# Altium PCB PCB.PcbDoc (part 2 of 2)
Units mil, origin at the board's own origin, x right, y up, seen from the top; angles counter-clockwise.
Board outline 14787 x 8400 mil, 2 copper layers (Top Layer, Bottom Layer); 237 components, 242 nets, 855 pads, 3 vias.
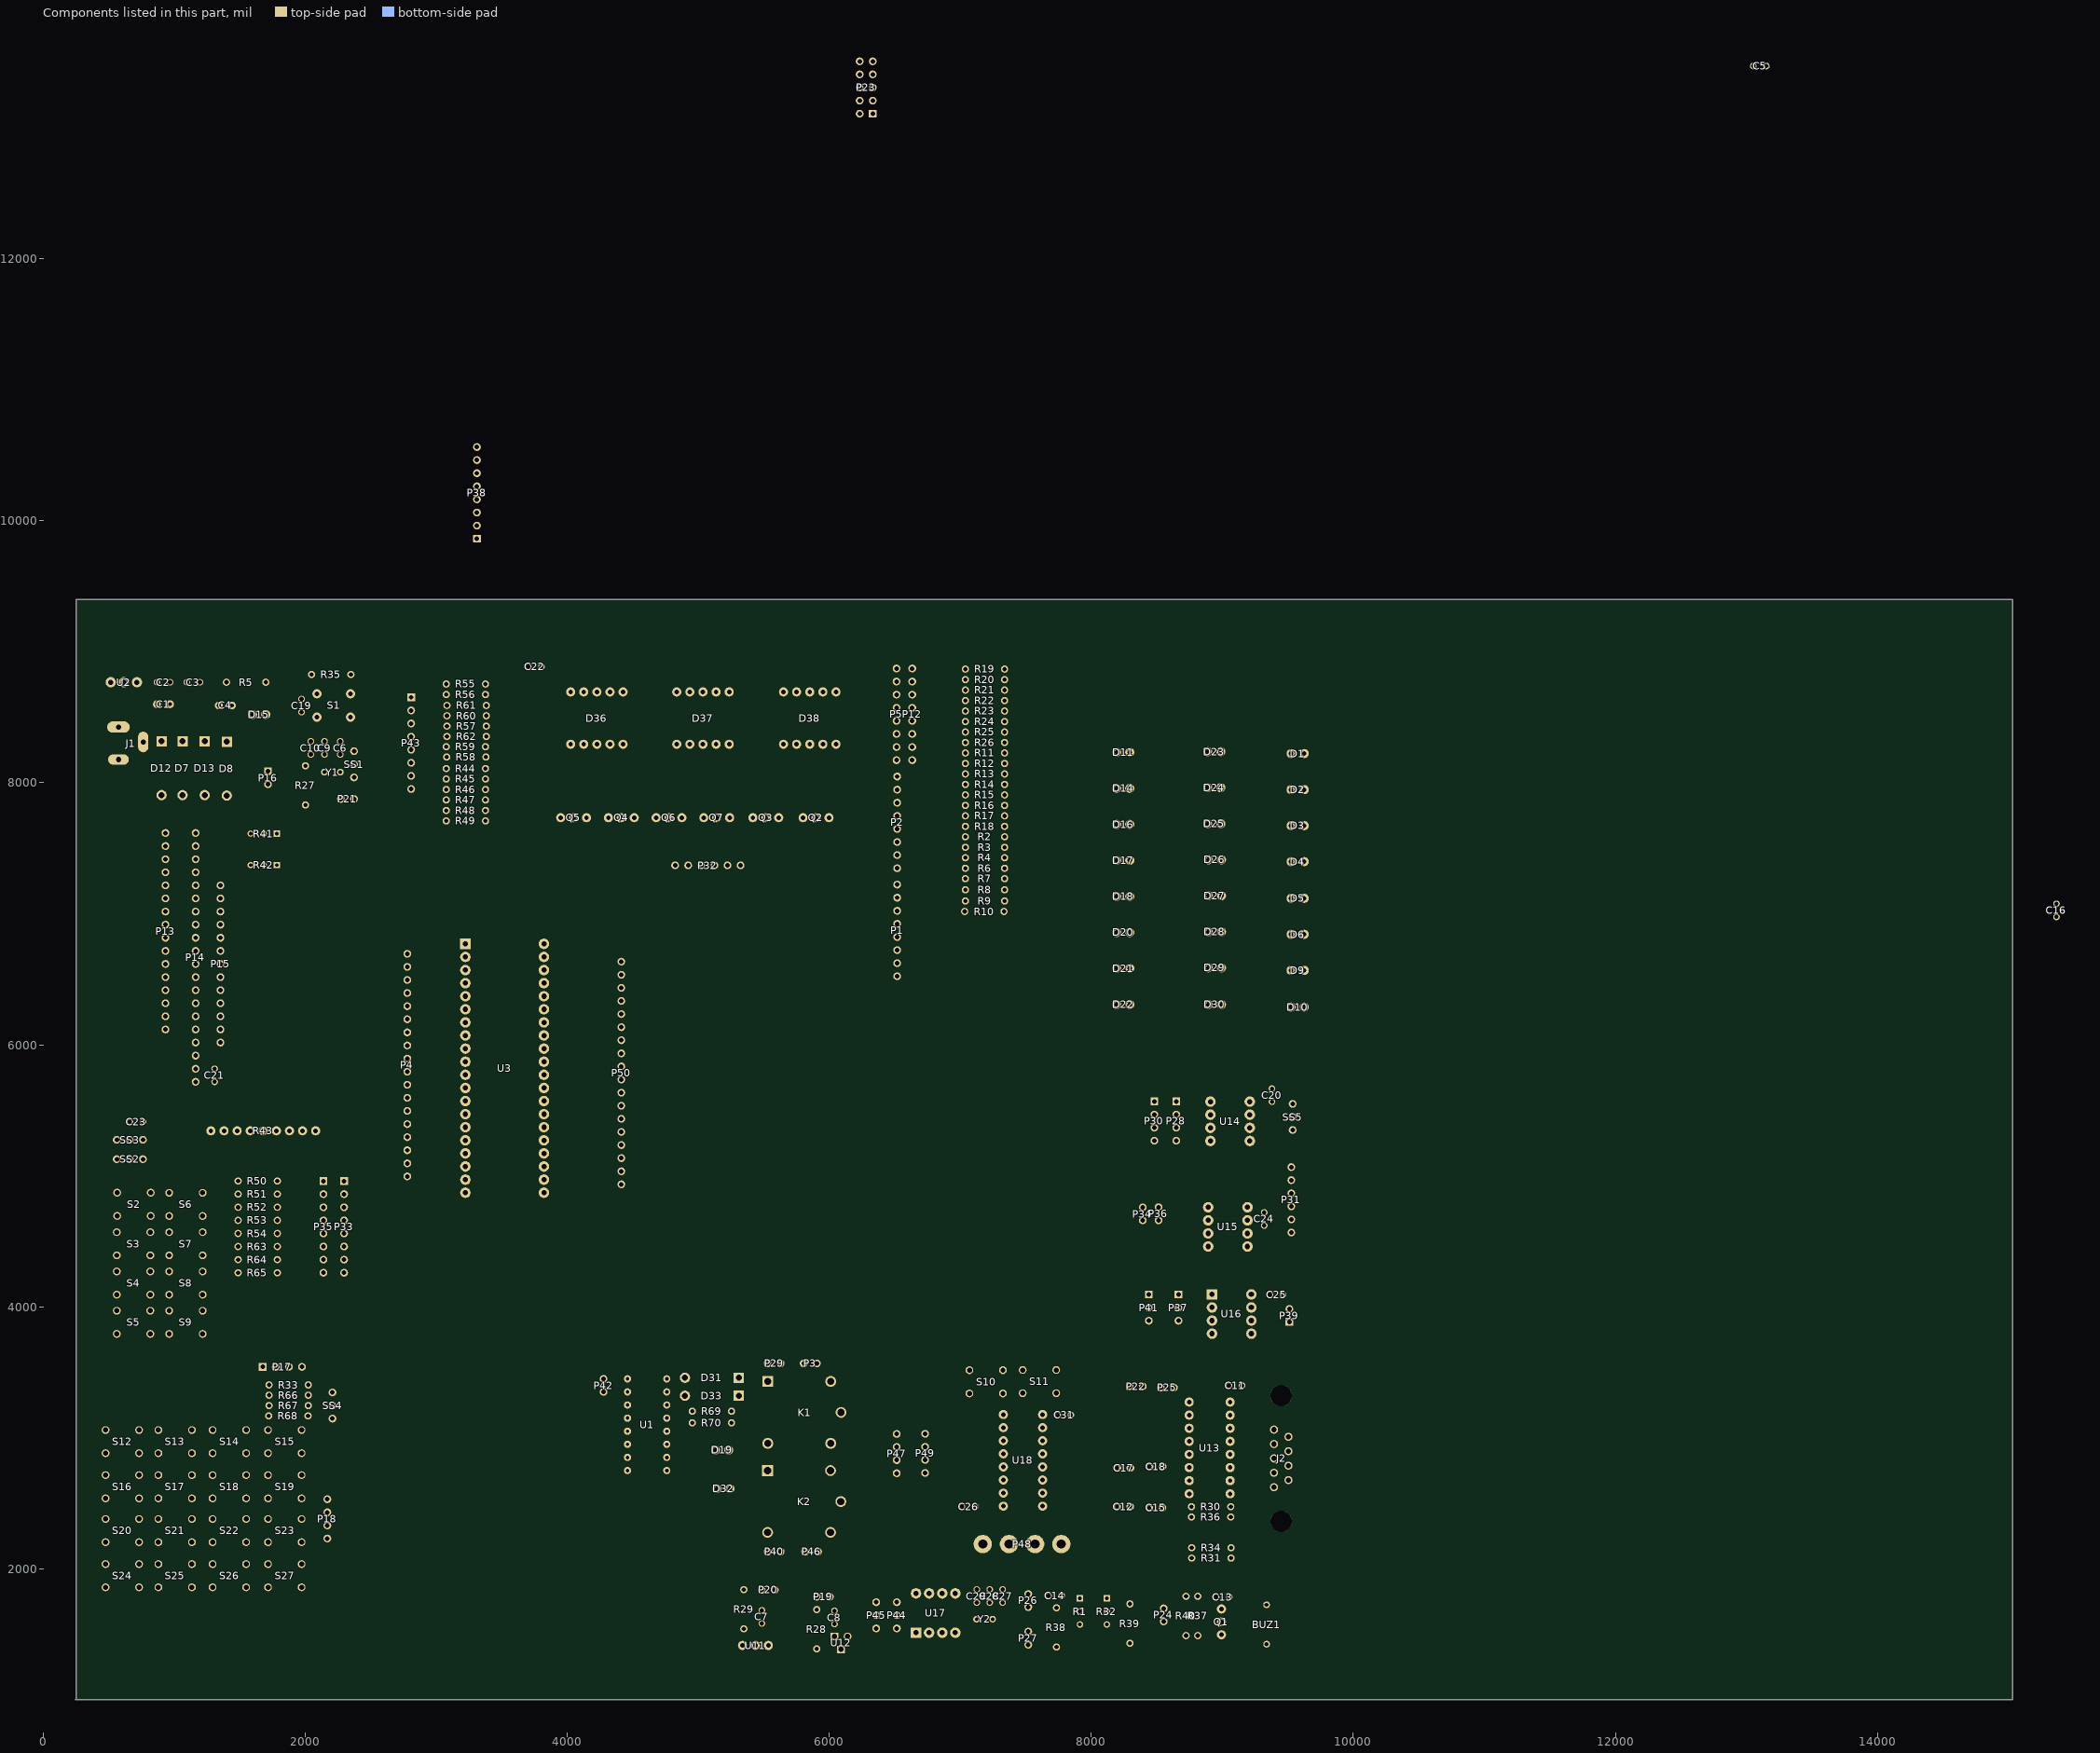
[diagram p2: the components of this part, seen from the top]

## Via types
v1: diameter 50, hole 28, Top Layer to Bottom Layer, 3 vias

## Nets (pads, with @x,y where several pads share a name; then routed paths per layer and width w, separated by ;. In a path a pad name is that pad's centre, name@x,y a point inside that pad or via, vN(x,y) a via of type N, cw(c..) or ccw(c..) an arc to the next point about the centre after c; other vN are vias at no path point) (continued)
copper on no net: (continued)
  Bottom Layer w39.37: 405.92,3551.18 406.24,3551.5 ; 406.24,3512.13 406.24,3639.76 ; 406.24,3561.02 406.24,3551.5 ; 406.24,6170.47 406.24,6166.38 ; 425.92,1267.72 406.24,1287.4 406.24,3551.5 ; 475.13,2035.43 524.35,2035.43 553.87,2064.96 553.87,2340.55 ; 475.13,2379.92 514.5,2379.92 ; 475.13,2714.57 524.35,2714.57 ; 475.13,3059.06 534.19,3059.06 553.87,3039.37 553.87,2744.09 ; 514.5,8767.72 514.5,8629.92 544.03,8600.39 867.26,8600.39 878.68,8600.39 918.05,8639.76 918.05,8679.13 ; 527.66,8177.83 573.68,8177.83 746.52,8177.83 762.66,8193.98 762.66,8311.69 ; 560.76,3969.84 630.57,3969.84 660.57,3999.84 660.57,4222.2 ; 560.76,4269.84 612.93,4269.84 ; 560.76,4569.84 622.77,4569.84 ; 563.72,4871.26 612.93,4871.26 ; 573.68,8425.87 573.68,8429.8 1029.58,8429.8 1055.84,8403.54 1055.84,8330.78 ; 614.5,8767.72 614.5,8915.35 ; 614.5,8944.88 614.5,8915.35 ; 657.26,4569.84 622.77,4569.84 ; 660.57,5127.17 660.57,4918.9 ; 660.57,5265.35 660.57,5245.67 662.14,5244.09 ; 660.57,5412.6 593.24,5412.6 562.14,5381.5 562.14,5276.38 560.57,5274.8 560.57,5156.69 ; 662.14,5125.59 663.72,5127.17 ; 714.5,8767.72 822.78,8767.72 ; 731.04,1858.27 878.68,1858.27 ; 731.04,2202.76 878.68,2202.76 ; 731.04,2537.4 878.68,2537.4 ; 731.04,2881.89 878.68,2881.89 ; 731.04,3059.06 731.04,3374.02 760.57,3403.54 1675.92,3403.54 ; 731.04,4713.78 750.72,4694.09 819.62,4694.09 ; 762.66,8356.69 762.66,8311.69 ; 763.72,5130.31 760.57,5127.17 760.57,5274.8 760.57,5412.6 760.57,5570.08 790.09,5599.61 1479.07,5599.61 ; 802.66,8291.69 828.57,8317.6 768.57,8317.6 762.66,8311.69 ; 802.66,8347.6 832.66,8317.6 902.66,8317.6 888.52,8303.46 888.52,8049.21 918.05,8019.69 1203.48,8019.69 1233.01,7990.16 1233.01,7906.92 1231.87,7905.79 1231.87,7853.5 1262.54,7822.83 1685.76,7822.83 1715.29,7852.36 1715.29,7988.58 ; 816.67,3792.68 816.67,3854.53 839.31,3877.17 ; 816.67,3969.84 960.76,3969.84 ; 816.67,4092.68 816.67,4149.8 849.15,4182.28 ; 816.67,4269.84 960.76,4269.84 ; 816.67,4392.68 816.67,4486.16 837.6,4507.09 ; 816.67,4569.84 960.76,4569.84 ; 819.62,4871.26 848.23,4871.26 848.38,4871.42 889.28,4871.42 889.44,4871.26 959.35,4871.26 960.76,4869.84 ; 878.68,2035.43 918.05,2035.43 947.57,2064.96 947.57,2350.39 ; 878.68,2379.92 918.05,2379.92 ; 878.68,2714.57 918.05,2714.57 ; 878.68,3059.06 918.05,3059.06 947.57,3029.53 947.57,2744.09 ; 907.51,8866.14 868.83,8827.47 868.83,8813.77 867.26,8812.2 ; 910.22,7753.94 1744.82,7753.94 1782.66,7716.09 1782.66,7612.17 ; 918.05,8875.98 1292.06,8875.98 1331.43,8836.61 1331.43,8807.09 ; 932.66,6217.17 997.66,6217.17 1032.66,6182.17 1032.66,5847.17 1062.66,5817.17 1162.66,5817.17 1307.66,5817.17 1410.17,5817.17 ; 932.66,6317.17 1162.66,6317.17 1352.66,6317.17 ; 932.66,6417.17 1162.66,6417.17 1352.66,6417.17 ; 932.66,6517.17 1162.66,6517.17 1352.66,6517.17 ; 932.66,6617.17 1162.66,6617.17 1352.66,6617.17 ; 932.66,6717.17 1162.66,6717.17 1352.66,6717.17 ; 932.66,6817.17 1162.66,6817.17 1352.66,6817.17 ; 932.66,6917.17 1162.66,6917.17 1352.66,6917.17 ; 932.66,7017.17 1162.66,7017.17 1352.66,7017.17 ; 932.66,7117.17 1162.66,7117.17 1352.66,7117.17 ; 932.66,7317.17 1162.66,7317.17 1322.66,7317.17 1352.66,7287.17 1352.66,7217.17 ; 932.66,7417.17 1012.66,7417.17 v1(1032.66,7437.17) ; 932.66,7517.17 1162.66,7517.17 1632.66,7517.17 ; 967.26,8561.02 967.26,8570.87 ; 967.26,8767.72 986.94,8748.03 986.94,8620.08 967.26,8600.39 967.26,8580.71 ; v1(1036.16,7665.35) 1065.68,7694.88 1557.81,7694.88 1582.66,7670.03 1582.66,7612.17 ; 1042.66,8317.6 1055.84,8330.78 ; 1062.35,7905.79 902.66,7905.79 ; 1095.21,8797.24 1095.21,8767.72 1203.48,8659.45 1203.48,8375.43 1231.87,8347.04 1231.87,8317.6 ; 1134.58,1858.27 1292.06,1858.27 ; 1134.58,2202.76 1292.06,2202.76 ; 1134.58,2537.4 1292.06,2537.4 ; 1134.58,2881.89 1292.06,2881.89 ; 1134.58,3059.06 1134.58,3295.28 1164.11,3324.8 1722.77,3324.8 ; 1162.66,5917.17 1417.66,5917.17 1457.66,5957.17 1457.66,7260.09 1489.74,7292.17 1754.66,7292.17 1782.66,7320.17 1782.66,7372.17 1777.66,7367.17 ; 1162.66,6017.17 1352.66,6017.17 ; 1162.66,6117.17 1352.66,6117.17 ; 1162.66,6217.17 1352.66,6217.17 ; 1162.66,7217.17 932.66,7217.17 455.45,7217.17 ; 1162.66,7417.17 1562.66,7417.17 1582.66,7397.17 1582.66,7372.17 ; 1162.66,7617.17 1146.48,7600.98 948.84,7600.98 932.66,7617.17 ; 1195.21,8767.72 1262.54,8700.39 1262.54,8541.34 1282.22,8521.65 1410.17,8521.65 ; 1216.67,3792.68 1335.53,3792.68 1370.8,3827.95 1370.8,4231.5 1399.15,4259.84 1486.55,4259.84 ; 1216.67,4092.68 1271.35,4092.68 1301.91,4123.23 1301.91,4339.76 1321.98,4359.84 1486.55,4359.84 ; 1216.67,4392.68 1223.17,4399.17 1223.17,4438.19 1242.85,4457.87 1484.58,4457.87 1486.55,4459.84 ; 1216.67,4692.68 1262.77,4692.68 1395.61,4559.84 1486.55,4559.84 ; 1220.53,8317.6 1231.87,8317.6 ; 1221.98,4978.35 1468.05,4978.35 1486.55,4959.84 ; 1272.38,4751.97 1301.91,4751.97 1394.03,4659.84 1486.55,4659.84 1481.83,4664.57 ; 1279.07,5266.93 1279.07,5343.7 ; 1292.06,2035.43 1341.28,2035.43 1370.8,2064.96 1370.8,2340.55 ; 1292.06,2379.92 1331.43,2379.92 ; 1292.06,2714.57 1331.43,2714.57 ; 1292.06,3059.06 1341.28,3059.06 1370.8,3029.53 1370.8,2753.94 ; 1307.66,5717.17 1162.66,5717.17 957.97,5717.17 932.66,5742.47 932.66,6077.17 ; 1339.7,8590.55 1331.43,8598.82 1331.43,8728.35 ; 1351.12,4801.18 1392.46,4759.84 1486.55,4759.84 ; 1371.87,8317.6 1231.87,8317.6 ; 1379.07,5262.2 1379.07,5343.7 1379.07,5380.31 1410.17,5411.42 2256.63,5411.42 2296,5372.05 2296,4959.84 2138.52,4959.84 ; 1400.33,7902.36 1400.33,8059.06 ; 1410.17,5816.14 1410.17,5817.17 ; 1420.41,4859.84 1486.55,4859.84 ; 1439.7,8590.55 1439.7,8551.18 ; 1479.07,5253.94 1479.07,5343.7 ; 1547.97,1858.27 1715.29,1858.27 ; 1547.97,2202.76 1715.29,2202.76 ; 1547.97,2537.4 1715.29,2537.4 ; 1547.97,2881.89 1715.29,2881.89 ; 1547.97,3059.06 1547.97,3216.54 1577.5,3246.06 1722.77,3246.06 1754.66,3246.06 ; 1577.5,5253.94 1579.07,5255.51 1579.07,5343.7 ; 1636.55,3403.54 1674.35,3441.34 ; 1674.35,3541.34 1674.35,3442.91 ; 1675.92,5253.94 1675.92,5342.52 1677.89,5342.52 1679.07,5343.7 ; 1682.66,7372.17 1682.66,7477.17 ; 1682.66,7612.17 1682.66,7557.17 ; 1697.18,8521.65 1697.18,8766.93 1697.97,8767.72 ; 1715.29,2035.43 1754.66,2035.43 1784.19,2064.96 1784.19,2340.55 ; 1715.29,2379.92 1749.74,2379.92 ; 1715.29,2714.57 1754.66,2714.57 ; 1715.29,3167.32 1720.41,3167.32 ; 1715.29,8088.58 1705.45,8098.43 1439.7,8098.43 ; 1720.41,3108.27 1720.41,3103.15 ; 1722.77,3403.54 1713.72,3403.54 ; 1726.71,4859.84 1786.55,4859.84 ; 1728.28,4759.84 1786.55,4759.84 1840.8,4759.84 ; 1728.68,4559.84 1786.55,4559.84 1857.81,4559.84 ; 1729.86,4659.84 1786.55,4659.84 1849.54,4659.84 ; 1745.55,4459.84 1786.55,4459.84 1788.52,4457.87 1913.32,4457.87 ; 1745.55,4959.84 1784.74,4959.84 ; 1756.24,4359.84 1786.55,4359.84 1786.94,4359.45 1951.51,4359.45 ; 1774.35,3442.91 1774.35,3541.34 ; 1779.07,5343.7 1780.25,5342.52 1784.19,5342.52 1784.19,5263.78 ; 1784.19,4962.2 1784.74,4961.65 ; 1784.19,4998.03 1784.74,4997.48 1784.74,4961.65 ; 1786.55,4259.84 1787.73,4261.02 2049.94,4261.02 2079.46,4261.02 2108.99,4261.02 2137.34,4261.02 ; 1788.13,4861.42 1786.55,4859.84 ; 1803.87,4861.42 1802.3,4859.84 1786.55,4859.84 ; 1872.77,3462.6 1872.77,3539.76 1874.35,3541.34 ; 1879.07,5343.7 1880.25,5342.52 1880.25,5266.14 1902.3,5244.09 ; 1971.2,1858.27 2030.25,1858.27 2059.78,1887.8 2059.78,2202.76 2087.73,2230.71 2168.05,2230.71 ; 1971.2,2202.76 1971.2,2281.5 2020.41,2330.71 2168.05,2330.71 ; 1971.2,2537.4 1971.2,2478.35 2018.83,2430.71 2168.05,2430.71 ; 1971.2,2881.89 1981.04,2872.05 2040.09,2872.05 2069.62,2842.52 2069.62,2557.09 2096,2530.71 2168.05,2530.71 ; 1971.2,3472.44 1971.2,3538.19 1974.35,3541.34 ; 1971.2,8639.76 2010.98,8679.55 2089.26,8679.55 2086.94,8681.87 ; 1979.07,5343.7 1979.07,5285.43 1999.54,5264.96 ; 2000.72,7830.31 1902.3,7830.31 ; 2001.47,8136.54 1976.91,8161.1 1976.91,8296.97 2041.47,8361.54 ; 2001.47,8316.54 2041.47,8316.54 2041.47,8361.54 ; 2020.41,3167.32 2022.77,3169.69 2022.77,3206.69 ; 2022.77,3295.28 2022.77,3292.91 ; 2022.77,3403.54 2022.77,3324.8 2022.77,3292.91 ; 2079.07,5343.7 2079.07,5289.09 2079.46,5288.7 2079.46,5253.94 ; 2089.26,8501.55 2009.41,8501.55 1971.2,8539.76 1912.14,8480.71 1912.14,8009.84 1941.67,7980.31 2030.72,7980.31 2060.53,8010.12 2060.53,8197.48 2041.47,8216.54 2141.47,8316.54 2146.47,8316.54 2266.47,8316.54 ; 2138.52,4259.84 2137.34,4261.02 ; 2138.52,4359.84 2296,4359.84 2296.39,4359.45 2335.37,4359.45 ; 2138.52,4459.84 2296,4459.84 2297.97,4457.87 2334.19,4457.87 ; 2138.52,4559.84 2296,4559.84 2335.37,4559.84 ; 2138.52,4659.84 2296,4659.84 2335.37,4659.84 ; 2138.52,4759.84 2296,4759.84 2333.4,4759.84 ; 2138.52,4859.84 2296,4859.84 2335.37,4860.24 ; 2146.47,8216.54 2145.45,8215.51 2145.45,8081.54 2145.45,7907.56 2176.47,7876.54 2271.47,7876.54 ; 2197.57,3146.06 2207.42,3146.06 2245.21,3146.06 2268.44,3169.29 2268.44,1708.66 2296,1681.1 5483.4,1681.1 5484.98,1682.68 5512.93,1682.68 5553.87,1641.73 ; 2197.57,3246.06 2069.62,3246.06 ; 2207.42,3346.06 2207.42,3639.76 2158.2,3688.98 455.45,3688.98 ; 2236.94,8968.23 2276.32,8968.23 ; 2266.47,8216.54 2267.5,8215.51 2267.5,8081.54 2267.5,8065.51 2291.47,8041.54 2371.47,8041.54 ; 2268.44,3177.17 2268.44,3917.32 2296,3944.88 2571.59,3944.88 2601.12,3974.41 2601.12,5568.9 2570.41,5599.61 1577.5,5599.61 ; 2296,4259.84 2294.82,4261.02 2137.34,4261.02 ; 2345.26,8501.55 2266.89,8501.55 2236.94,8531.5 2236.94,8928.86 ; 2345.26,8679.55 2347.57,8681.87 2347.57,8826.77 2367.26,8846.46 3181.83,8846.46 3221.59,8806.69 3221.59,6828.74 ; 2371.47,7876.54 2416.47,7876.54 2441.47,7901.54 2441.47,8121.54 2421.47,8141.54 2371.47,8141.54 ; 2371.47,8241.54 2371.47,8347.76 2343.64,8375.59 2055.53,8375.59 2041.47,8361.54 ; 2500.53,7877.07 2500.53,7901.57 ; 2778.28,4994.88 2778.28,4929.13 2836.55,4870.87 3221.59,4870.87 ; 2778.28,5094.88 2778.28,5086.61 2894.03,4970.87 3221.59,4970.87 ; 2778.28,5194.88 2902.3,5070.87 3221.59,5070.87 ; 2778.28,5294.88 2902.3,5170.87 3221.59,5170.87 ; 2778.28,5394.88 2784.98,5394.88 2908.99,5270.87 3221.59,5270.87 ; 2778.28,5494.88 2902.3,5370.87 3221.59,5370.87 ; 2778.28,5594.88 2778.28,5578.74 2801.12,5555.91 2803.56,5555.91 2888.6,5470.87 3221.59,5470.87 ; 2778.28,5694.88 2902.3,5570.87 3221.59,5570.87 ; 2778.28,5794.88 2847.57,5864.17 3214.9,5864.17 3221.59,5870.87 ; 2778.28,5894.88 2779.46,5894.88 2855.45,5970.87 3221.59,5970.87 ; 2778.28,5994.88 2844.43,6061.02 3211.75,6061.02 3221.59,6070.87 ; 2778.28,6094.88 2787.39,6094.88 2863.37,6170.87 3221.59,6170.87 ; 2778.28,6194.88 2854.27,6270.87 3221.59,6270.87 ; 2778.28,6294.88 2859.39,6375.98 3216.47,6375.98 3221.59,6370.87 ; 2778.28,6394.88 2787.34,6394.88 2866.87,6474.41 3218.05,6474.41 3221.59,6470.87 ; 2778.28,6494.88 2793.69,6494.88 2871.64,6572.83 3219.62,6572.83 3221.59,6570.87 ; 2778.28,6594.88 2790.49,6594.88 2866.47,6670.87 3221.59,6670.87 ; 2778.28,6694.88 2854.27,6770.87 3163.72,6770.87 ; 2807.81,8152.76 2810.57,8152.76 ; 3075.28,7753.94 3075.28,7750.27 ; 3075.28,8109.17 3075.28,8029.17 3075.28,7949.17 3075.28,7869.17 3075.28,7789.17 3075.28,7750.27 ; 3081.04,8423.23 3081.04,8433.07 ; 3221.59,5670.87 3441.28,5670.87 3641.28,5870.87 3821.59,5870.87 ; 3221.59,5770.87 3403.48,5770.87 3603.48,5970.87 3821.59,5970.87 ; 3375.28,7709.17 3547.06,7537.4 5219.23,7537.4 5248.76,7566.93 5248.76,7724.41 5238.91,7734.25 ; 3375.28,7789.17 3378.8,7789.17 3571.52,7596.46 4845.21,7596.46 4874.74,7625.98 4874.74,7734.25 ; 3375.28,7869.17 3382.32,7869.17 3408.97,7842.52 4126.71,7842.52 4146.39,7822.83 4146.39,7734.25 ; 3375.28,7949.17 3405.57,7949.17 3437.73,7917.01 4455.76,7917.01 4510.57,7862.2 4510.57,7734.25 ; 3375.28,8029.17 3409.08,8029.17 3462.19,7976.06 5558.13,7976.06 5612.93,7921.26 5612.93,7734.25 ; 3375.28,8109.17 3412.6,8109.17 3486.66,8035.12 5951.83,8035.12 5996.79,7990.16 5996.79,7734.25 ; 3375.29,8275.87 3427.61,8275.87 3536.16,8167.32 4195.91,8167.32 4225.28,8196.7 4225.28,8294.17 4225.28,8359.17 ; 3375.28,8674.17 3378.68,8677.57 3378.68,8679.13 3467.26,8679.13 ; 3378.68,8196.85 3423.11,8196.85 3525.79,8094.17 4380.28,8094.17 ; 3381.04,8354.33 3432.67,8354.33 3560.62,8226.38 4087.34,8226.38 4125.28,8264.32 4125.28,8294.17 4125.28,8359.17 ; 3381.04,8431.18 3449.46,8431.18 3585.37,8295.28 4025.28,8295.28 ; 3381.04,8511.81 3457.42,8511.81 ; 3381.04,8590.55 3390.88,8580.71 3467.26,8580.71 ; 3821.59,4870.87 4348.36,4870.87 4412.14,4934.65 ; 3821.59,4970.87 4348.36,4970.87 4412.14,5034.65 ; 3821.59,5070.87 4348.36,5070.87 4412.14,5134.65 ; 3821.59,5170.87 4348.36,5170.87 4412.14,5234.65 ; 3821.59,5270.87 4348.36,5270.87 4412.14,5334.65 ; 3821.59,5370.87 4348.36,5370.87 4412.14,5434.65 ; 3821.59,5470.87 4348.36,5470.87 4412.14,5534.65 ; 3821.59,5570.87 4348.36,5570.87 4412.14,5634.65 ; 3821.59,5670.87 4348.36,5670.87 4412.14,5734.65 ; 3821.59,5770.87 4348.36,5770.87 4412.14,5834.65 ; 3821.59,6070.87 4275.92,6070.87 4412.14,5934.65 ; 3821.59,6170.87 4275.92,6170.87 4412.14,6034.65 ; 3821.59,6270.87 4275.92,6270.87 4412.14,6134.65 ; 3821.59,6370.87 4275.92,6370.87 4412.14,6234.65 ; 3821.59,6470.87 4275.92,6470.87 4412.14,6334.65 ; 3821.59,6570.87 4275.92,6570.87 4412.14,6434.65 ; 3821.59,6670.87 4275.92,6670.87 4412.14,6534.65 ; 3821.59,6770.87 4332.22,6770.87 4412.14,6690.94 4412.14,6634.65 ; 4025.28,8294.17 4025.28,8404.17 ; 4025.28,8694.17 4025.28,8864.17 4070.28,8909.17 4800.28,8909.17 ; 4225.13,8659.45 4225.28,8659.6 4225.28,8694.17 4225.28,8824.17 4251.23,8850.12 4729.34,8850.12 4760.91,8818.54 4760.91,8689.17 ; 4276.67,3349.96 4458.95,3349.96 ; 4276.67,3449.96 4458.95,3449.96 ; 4323.56,8629.92 4323.56,8692.45 4325.28,8694.17 4325.28,8764.17 4352.17,8791.06 4683.39,8791.06 4701.86,8772.6 4701.86,8622.6 ; 4421.98,8629.92 4421.98,8690.87 4425.28,8694.17 4610.28,8694.17 4642.8,8661.65 4642.8,8576.65 ; 4425.28,8294.17 4425.28,8139.17 ; 4701.23,8374.17 4701.23,8198.23 4744.34,8155.12 4996.23,8155.12 5035.28,8194.17 5035.28,8294.17 5035.28,8344.17 ; 4758.95,3349.96 4868.01,3349.96 4897.54,3320.43 4890.37,3313.27 4890.37,2549.25 4916.43,2523.19 5221.55,2523.19 5241.24,2542.87 5241.24,2611.77 5241.24,2798.78 5264.86,2822.4 5896.75,2822.4 5930.21,2788.94 5930.21,2306.65 5959.74,2277.13 6008.95,2277.13 ; 4758.95,3449.96 4889.27,3449.96 4897.54,3458.23 4995.17,3458.23 ; 4760.28,8394.17 4760.28,8244.17 4790.28,8214.17 4915.28,8214.17 4935.28,8234.17 4935.28,8294.17 4935.28,8364.17 ; 4835.28,8294.17 4835.28,8469.17 4835.28,8489.17 ; 4835.28,8694.17 4835.28,8869.17 ; 4953.44,3113.74 5005.02,3113.74 ; 4953.44,3202.32 5014.86,3202.32 ; 5002.69,1218.5 5009.03,1224.84 5396.39,1224.84 ; 5035.28,8649.17 5035.28,8694.17 5035.28,8814.17 5071.23,8850.12 5554.34,8850.12 5575.28,8829.17 5575.28,8814.17 5575.91,8813.54 5575.91,8674.17 ; 5093.6,2611.77 5141.24,2611.77 ; 5131.39,2907.05 5132.97,2908.62 5132.97,2975.94 ; 5135.28,8634.17 5135.28,8694.17 5135.28,8764.17 5160.28,8789.17 5485.28,8789.17 5510.28,8764.17 5516.86,8764.17 5516.86,8627.6 ; 5192.02,2956.26 5231.39,2916.89 5231.39,2907.05 5256.98,2881.46 5975.96,2881.46 6008.95,2914.45 6008.95,2957.28 ; 5235.28,8294.17 5235.28,8139.17 ; 5235.28,8584.17 5235.28,8694.17 5425.28,8694.17 5457.8,8661.65 5457.8,8591.65 ; 5253.44,3113.74 5253.44,3202.32 5309.35,3258.23 5309.35,3320.43 5309.35,3458.23 5309.35,3667.76 5337.06,3695.47 5963.2,3695.47 6008.95,3649.72 6008.95,3468.07 6136.91,3468.07 ; 5337.29,1414.31 5337.29,1531.06 5347.18,1540.94 ; 5347.18,1840.94 5581.04,1840.94 5583.4,1838.58 ; 5484.98,1582.68 5475.13,1582.68 5435.72,1543.26 5435.72,1414.31 5435.72,1264.26 ; 5516.86,8354.17 5516.86,8196.65 5560.28,8153.23 5824.34,8153.23 5850.28,8179.17 5850.28,8294.17 ; 5526.67,3567.52 5526.67,3470.04 5528.64,3468.07 ; 5528.64,2130.51 5528.64,2277.13 ; 5528.64,2749.57 5782.57,2749.57 5812.1,2720.04 5812.1,2133.98 ; 5528.64,2995.63 5782.57,2995.63 5802.26,3015.31 5802.26,3567.52 ; 5534.14,1414.31 5553.87,1414.31 5553.87,1641.73 ; 5575.91,8389.17 5575.91,8248.54 5604.65,8219.8 5725.91,8219.8 5750.28,8244.17 5750.28,8294.17 ; 5628.56,3567.52 5628.56,3613.27 5651.71,3636.42 5873.44,3636.42 5904.15,3605.71 5904.15,3567.52 ; 5628.64,2130.51 5628.64,2091.06 5658.09,2061.61 5874.62,2061.61 5913.99,2100.98 ; 5650.28,8294.17 5650.28,8419.17 ; 5650.28,8694.17 5650.28,8864.17 5605.28,8909.17 4865.28,8909.17 ; 5850.28,8659.17 5850.28,8694.17 ; 5902.26,3269.65 5940.06,3231.85 6087.69,3231.85 ; 5903.64,1688.36 5904.15,1688.87 5904.15,1746.65 ; 5912.1,2130.51 5913.99,2130.51 ; 5914.23,1383.23 6089.23,1383.23 ; 5950.28,8614.17 5950.28,8694.17 ; 6004.15,1786.02 5943.52,1786.02 ; 6008.95,2749.57 6156.59,2749.57 ; 6039.23,1578.23 6039.23,1533.46 ; 6050.28,8294.17 6050.28,8134.17 6010.28,8094.17 5275.28,8094.17 ; 6050.28,8599.17 6050.28,8694.17 ; 6087.69,2513.35 6087.69,2150.2 6086.67,2150.2 6066.98,2130.51 5943.52,2130.51 ; 6176.28,3655.08 6176.28,3626.57 6176.28,3507.44 ; 6176.28,3665.94 6205.8,3695.47 6244.15,3695.47 7636.43,3695.47 7665.96,3665.94 7665.96,3215.63 ; 6193.64,1483.23 6189.46,1483.23 ; 6357.93,1544.76 6515.41,1544.76 6559.82,1589.17 6922.42,1589.17 6961.47,1628.23 6961.47,1812.09 ; 6357.93,1644.76 6515.41,1644.76 6531.89,1644.76 6535.36,1648.23 6829.35,1648.23 6859.9,1678.78 6859.9,1810.51 6861.47,1812.09 ; 6357.93,1744.76 6515.41,1744.76 6533.2,1726.97 6730.92,1726.97 6761.47,1757.52 6761.47,1812.09 ; 6512.89,8173.03 6632.89,8173.03 6707.89,8173.03 6842.89,8308.03 7037.89,8308.03 ; 6512.89,8273.03 6632.89,8273.03 6702.89,8273.03 6817.89,8388.03 7037.89,8388.03 ; 6512.89,8373.03 6632.89,8373.03 6692.89,8373.03 6787.89,8468.03 7037.89,8468.03 ; 6512.89,8473.03 6632.89,8473.03 6687.89,8473.03 6762.89,8548.03 7037.89,8548.03 ; 6512.89,8573.03 6632.89,8573.03 6687.89,8573.03 6742.89,8628.03 7037.89,8628.03 ; 6512.89,8673.03 6632.89,8673.03 6692.89,8673.03 6727.89,8708.03 7037.89,8708.03 ; 6512.89,8773.03 6632.89,8773.03 6632.89,8774.96 7024.82,8774.96 7037.89,8788.03 ; 6512.89,8873.03 6632.89,8873.03 7032.89,8873.03 7037.89,8868.03 ; 6514.39,2729.33 6515.96,2730.91 6730.92,2730.91 7006.51,2730.91 7045.88,2770.28 7045.88,3045.87 7077.54,3077.52 7327.85,3077.52 7340.84,3077.52 ; 6514.39,2929.33 6729.35,2929.33 6730.92,2930.91 6783.28,2930.91 6819.5,2967.13 6819.5,3547.83 6849.03,3577.36 7439.02,3577.36 ; 6514.39,3029.33 6729.35,3029.33 6730.92,3030.91 6730.92,3606.89 6760.45,3636.42 7478.95,3636.42 ; 6517.89,6523.03 6997.89,6523.03 7022.89,6548.03 7022.89,7008.03 7032.89,7018.03 ; 6517.89,6623.03 6937.89,6623.03 6962.89,6648.03 6962.89,7068.03 6992.89,7098.03 7037.89,7098.03 ; 6517.89,6723.03 6882.89,6723.03 6903.83,6743.98 6903.83,7123.03 6963.83,7183.03 7037.89,7183.03 ; 6517.89,6823.03 6822.89,6823.03 6844.78,6844.92 6844.78,7149.92 6962.89,7268.03 7037.89,7268.03 ; 6517.89,6923.03 6522.89,6918.03 6762.89,6918.03 6782.89,6938.03 6782.89,7171.55 6946.3,7334.96 7024.82,7334.96 7037.89,7348.03 ; 6517.89,7023.03 6693.83,7023.03 6723.83,7053.03 6723.83,7196.01 6955.86,7428.03 7037.89,7428.03 ; 6517.89,7123.03 6642.89,7123.03 6664.78,7144.92 6664.78,7224.92 6947.89,7508.03 7037.89,7508.03 ; 6517.89,7223.03 6577.89,7223.03 6942.89,7588.03 7037.89,7588.03 ; 6517.89,7348.03 6592.89,7348.03 6912.89,7668.03 7037.89,7668.03 ; 6517.89,7448.03 6607.89,7448.03 6794.82,7634.96 6794.82,7636.44 6893.34,7734.96 7024.82,7734.96 7037.89,7748.03 ; 6517.89,7548.03 6622.89,7548.03 6889.82,7814.96 7024.82,7814.96 7037.89,7828.03 ; 6517.89,7648.03 6637.89,7648.03 6884.82,7894.96 7024.82,7894.96 7037.89,7908.03 ; 6517.89,7748.03 6652.89,7748.03 6879.82,7974.96 7024.82,7974.96 7037.89,7988.03 ; 6517.89,7848.03 6662.89,7848.03 6869.82,8054.96 7024.82,8054.96 7037.89,8068.03 ; 6517.89,7948.03 6667.89,7948.03 6854.82,8134.96 7024.82,8134.96 7037.89,8148.03 ; 6517.89,8048.03 6677.89,8048.03 6844.82,8214.96 7024.82,8214.96 7037.89,8228.03 ; 6661.47,1512.09 6661.47,1471.06 ; 6661.47,1812.09 6380.06,1812.09 6347.06,1845.08 6347.06,2721.06 6318.56,2749.57 6156.59,2749.57 ; 6730.92,2830.91 6729.35,2829.33 6514.39,2829.33 6445.49,2829.33 6415.96,2799.8 6415.96,2681.69 6445.49,2652.17 7173.83,2652.17 7248.48,2577.52 7327.85,2577.52 ; 6761.47,1512.09 6761.47,1428.23 6817.06,1372.64 7198.01,1372.64 7243.76,1418.39 7243.76,1632.95 7245.72,1634.92 7245.72,1719.96 7224.07,1741.61 ; 6861.47,1512.09 6861.47,1466.02 6895.8,1431.69 7089.74,1431.69 7123.68,1465.63 7123.68,1731.38 7125.65,1733.35 ; 6961.47,1512.09 7012.65,1512.09 7032.97,1532.4 7032.97,1799.21 ; 7012.89,2475 7032.97,2454.92 7032.97,1887.8 ; 7046.91,1841.61 7079.15,1841.61 ; 7112.89,2477.52 7327.85,2477.52 ; 7170.76,2188.54 7160.53,2178.31 7160.53,2109.8 7190.06,2080.28 7436.12,2080.28 ; v1(7183.68,2780.12) 7186.28,2777.52 7327.85,2777.52 7327.85,2877.52 ; 7321.55,2483.82 7327.85,2477.52 ; 7322.5,1741.61 7322.5,1343.11 ; 7322.5,1841.61 7224.07,1841.61 7125.65,1841.61 7079.15,1841.61 ; 7326.28,2975.95 7327.85,2977.52 7328.4,2976.97 7370.69,2976.97 ; 7326.59,2476.26 7327.85,2477.52 ; 7327.85,3177.52 7327.85,3340.12 ; 7327.85,3517.28 7475.49,3517.28 ; 7332.89,7018.03 7344.5,7006.42 7344.5,5759.05 7370.69,5732.87 9496.67,5732.87 9524.62,5760.83 9524.62,6288.03 9508.01,6288.03 ; 7334.54,2670.83 7327.85,2677.52 7355.17,2677.52 7366.51,2666.18 ; 7337.89,7098.03 7372.89,7098.03 7403.56,7067.36 7403.56,5818.11 7429.74,5791.93 9398.24,5791.93 9422.22,5815.91 9422.22,6505.63 9484.62,6568.03 9524.62,6568.03 ; 7337.89,7183.03 7437.89,7183.03 7462.61,7158.31 7462.61,5877.16 7488.8,5850.98 9339.19,5850.98 9363.17,5874.96 9363.17,6818.31 9387.89,6843.03 9524.62,6843.03 ; 7337.89,7268.03 7497.89,7268.03 7521.67,7244.25 7521.67,5936.22 7547.85,5910.04 9280.13,5910.04 9304.11,5934.02 9304.11,7099.25 9322.89,7118.03 9524.62,7118.03 ; 7337.89,7348.03 7545.72,7348.03 7580.72,7313.03 7580.72,5995.28 7606.91,5969.09 9221.08,5969.09 9245.06,5993.07 9245.06,7370.2 9272.89,7398.03 9524.62,7398.03 ; 7337.89,7428.03 7609.78,7428.03 7639.78,7398.03 7639.78,6054.33 7665.96,6028.15 9162.02,6028.15 9186,6052.13 9186,7651.14 9207.89,7673.03 9524.62,7673.03 ; 7337.89,7507.09 7678.83,7507.09 7698.83,7487.09 7698.83,6113.39 7725.02,6087.2 9102.97,6087.2 9126.94,6111.18 9126.94,7922.09 9152.89,7948.03 9524.62,7948.03 ; 7337.89,7588.03 7732.89,7588.03 7757.89,7563.03 7757.89,6172.44 7784.07,6146.26 9043.91,6146.26 9067.89,6170.24 9067.89,8193.03 9097.89,8223.03 9524.62,8223.03 ; 7337.89,7668.03 7787.89,7668.03 7817.89,7638.03 7817.89,6338.03 7847.89,6308.03 8192.89,6308.03 ; 7337.89,7748.03 7847.89,7748.03 7878.83,7717.09 7878.83,6622.09 7917.89,6583.03 8192.89,6583.03 ; 7337.89,7828.03 7907.89,7828.03 7937.89,7798.03 7937.89,6903.03 7977.89,6863.03 8187.89,6863.03 8192.89,6858.03 ; 7337.89,7908.03 7967.89,7908.03 7999.78,7876.14 7999.78,7181.14 8047.89,7133.03 8192.89,7133.03 ; 7337.89,7988.03 8022.89,7988.03 8058.83,7952.09 8058.83,7442.09 8092.89,7408.03 8192.89,7408.03 ; 7337.89,8068.03 8072.89,8068.03 8117.89,8023.03 8117.89,7723.03 8157.89,7683.03 8192.89,7683.03 ; 7337.89,8148.03 8162.89,8148.03 8192.89,8118.03 8192.89,7958.03 ; 7337.89,8228.03 8187.89,8228.03 8192.89,8233.03 ; 7337.89,8308.03 8417.89,8308.03 8442.89,8283.03 8442.89,8248.03 8443.83,8247.09 8443.83,6357.09 8483.56,6317.36 8883.56,6317.36 8892.89,6308.03 ; 7337.89,8388.03 8462.89,8388.03 8502.89,8348.03 8502.89,6623.03 8537.89,6588.03 8892.89,6588.03 ; 7337.89,8468.03 8527.89,8468.03 8566.67,8429.25 8566.67,6899.25 8602.89,6863.03 8892.89,6863.03 ; 7337.89,8548.03 8582.89,8548.03 8625.72,8505.2 8625.72,7170.2 8657.89,7138.03 8892.89,7138.03 ; 7337.89,8628.03 8642.89,8628.03 8684.78,8586.14 8684.78,7441.14 8712.89,7413.03 8892.89,7413.03 ; 7337.89,8708.03 8702.89,8708.03 8743.83,8667.09 8743.83,7717.09 8772.89,7688.03 8887.89,7688.03 ; 7337.89,8788.03 8762.89,8788.03 8802.89,8748.03 8802.89,7993.03 8832.89,7963.03 8887.89,7963.03 ; 7337.89,8868.03 8837.89,8868.03 8887.89,8818.03 8887.89,8238.03 ; 7370.76,2188.54 7380.53,2198.31 ; 7475.49,3340.12 7477.42,3338.19 7477.42,3272.24 ; 7518.32,1520.28 7518.32,1420.28 7518.32,1372.64 7548.01,1342.95 8266.2,1342.95 8294.35,1371.1 8294.35,1431.54 ; 7518.32,1807.28 7518.32,1776.18 ; 7531,2477.52 7627.85,2477.52 ; 7570.76,2188.54 7570.76,2271.54 7721.39,2422.17 7721.39,2631.61 7682.18,2670.83 7634.54,2670.83 7627.85,2677.52 ; 7578.64,2577.52 7627.85,2577.52 ; 7587.22,3075.39 7589.35,3077.52 7627.85,3077.52 ; 7606.91,2012.4 7640.02,2012.4 ; 7627.85,2877.52 7627.85,2777.52 7732.97,2777.52 7793.91,2716.57 7793.91,2408.54 7671.08,2285.71 ; 7627.85,2977.52 7822.89,2977.52 7852.97,2947.44 7852.97,2270.75 7770.76,2188.54 ; 7673.13,2117.99 7673.13,2051.77 ; 7715.17,3177.52 7704.07,3177.52 ; 7731.39,3517.28 8270.41,3517.28 ; 7733.13,1709.54 7878.13,1709.54 7913.13,1674.54 ; 7733.32,1402.01 7636.59,1402.01 7606.91,1431.69 7606.91,1687.6 7587.22,1707.28 ; 7743.13,3173.82 7739.43,3177.52 7704.07,3177.52 ; 7773.13,1794.54 7793.13,1774.54 7913.13,1774.54 8118.13,1774.54 8118.13,1893.7 8148.24,1923.82 8423.83,1923.82 ; 7843.13,3173.82 7892.34,3173.82 7921.87,3144.29 7921.87,2061.61 ; 8118.13,1574.54 7913.13,1574.54 7696.2,1574.54 7666.2,1604.54 7666.2,1794.54 7673.13,1794.54 7673.13,1973.03 ; 8118.13,1674.54 8153.13,1709.54 8288.13,1709.54 ; 8187.61,2770.28 8188.64,2769.25 ; 8195.88,2475 8195.88,2515.94 ; 8197.46,2770.28 8197.46,3223.03 8236.83,3262.4 8736.19,3262.4 8746.43,3272.65 ; 8292.89,8233.03 8292.89,7958.03 8292.89,7683.03 8292.89,7408.03 8292.89,7133.03 8292.89,6858.03 8292.89,6583.03 8292.89,6308.03 8292.89,6251.46 8330.68,6213.66 8965.17,6213.66 8994.7,6243.19 8994.7,6306.22 8992.89,6308.03 8987.89,6313.03 8987.89,7688.03 8987.89,7963.03 8987.89,8238.03 8987.89,8269.21 9024.23,8305.55 9575.84,8305.55 ; 8295.88,2475 8295.88,2327.36 8345.09,2278.15 8876.59,2278.15 8914.07,2315.63 8914.07,3231.39 8955.33,3272.65 9059.03,3272.65 9049.98,3281.7 9049.98,3399.17 ; 8295.88,2796.57 8295.88,3055.71 8312.82,3072.65 8746.43,3072.65 ; 8392.1,3392.72 8292.1,3392.72 8062.03,3392.72 8000.61,3331.3 8000.61,2110.83 8030.13,2081.3 8756.12,2081.3 ; 8392.1,4659.02 8473.05,4659.02 ; 8392.1,4759.02 8511.39,4759.02 8512.42,4760.04 8562.42,4760.04 8562.42,4760.83 8601,4722.24 ; 8438.6,3893.23 8664.98,3893.23 8919.31,3893.23 8920.88,3894.8 ; 8438.6,3993.23 8664.98,3993.23 8919.31,3993.23 8920.88,3994.8 ; 8438.6,4093.23 8664.98,4093.23 8919.31,4093.23 8920.88,4094.8 ; 8443.52,2780.12 8443.52,2919.09 ; 8452.77,2928.35 8443.52,2919.09 ; 8461,2464.13 8461,2414.92 8480.68,2395.24 8580.29,2395.24 8608.64,2423.58 8608.64,2720.04 8661.24,2772.65 8746.43,2772.65 ; 8480.68,5267.68 8648.01,5267.68 8907.46,5267.68 8909.03,5266.1 ; 8480.68,5367.68 8648.01,5367.68 8907.46,5367.68 8909.03,5366.1 ; 8480.68,5467.68 8648.01,5467.68 8907.46,5467.68 8909.03,5466.1 ; 8480.68,5567.68 8648.01,5567.68 8907.46,5567.68 8909.03,5566.1 ; 8511.39,4572.48 8511.39,4620.67 ; 8541.94,2465.16 8541.94,2593.11 8512.42,2622.64 8148.24,2622.64 8118.72,2593.11 8118.72,2248.62 8148.24,2219.09 8876.59,2219.09 8906.12,2189.57 8906.12,2041.93 8935.65,2012.4 ; 8543.52,2780.12 8543.52,2850.59 8565.57,2872.65 8746.43,2872.65 ; 8551.79,1697.44 8551.79,1597.44 8551.79,1461.22 8582.63,1430.38 8786.69,1430.38 8812.5,1456.18 8812.5,1489.43 ; 8629.9,3382.88 8529.9,3382.88 8529.9,3359.8 8501.39,3331.3 8118.72,3331.3 8059.66,3272.24 8059.66,2160.04 8745.09,2160.04 ; 8722.5,1489.43 8682.24,1489.43 8659.03,1512.64 8659.03,1827.6 8688.56,1857.13 8924.78,1857.13 8952.5,1829.41 8952.5,1784.43 8952.5,1732.86 8992.5,1692.86 9044.76,1640.59 9616.68,1640.59 9616.68,1642.25 ; 8722.5,1789.43 8812.5,1789.43 8812.5,1609.43 8827.5,1594.43 8992.5,1594.43 ; 8746.43,2572.65 8746.43,2491.3 8763.76,2473.98 ; 8746.43,2672.65 8705.49,2672.65 8669.9,2637.05 8669.9,2432.4 8707.06,2395.24 8763.76,2395.24 ; 8746.43,2972.65 8497.07,2972.65 8443.52,2919.09 ; 8746.43,3172.65 8795.5,3172.65 ; 8817.54,4453.35 8884.86,4453.35 8891.55,4460.04 ; 8847.06,4660.04 8891.55,4660.04 ; 8848.64,4560.04 8891.55,4560.04 ; 8891.55,4760.04 8891.55,4802.95 ; 8982.65,2674.22 8984.23,2672.65 9059.03,2672.65 ; 8992.5,1496.01 8992.5,1439.43 9007.5,1424.43 9337.5,1424.43 ; 9004.54,2081.3 9056.12,2081.3 ; 9018.87,2572.65 9059.03,2572.65 ; 9024.96,2160.04 9065.96,2160.04 ; 9043.91,5063.58 9523.05,5063.58 9526.2,5066.73 9618.52,5066.73 9625.21,5073.43 ; 9049.98,3310.59 9049.98,3399.17 ; 9052.5,1784.43 9058.43,1790.37 9305.31,1790.37 ; 9059.03,3172.65 9059.18,3172.8 9120.45,3172.8 9149.98,3202.32 9149.98,3399.17 ; 9063.76,2395.24 9179.5,2395.24 9209.03,2424.76 9209.03,2535.83 9208.73,2536.13 9208.73,2574.58 9209.03,2574.88 9209.03,2700.35 9240.88,2732.2 9394.31,2732.2 ; 9063.76,2473.98 9110.61,2473.98 9140.13,2503.5 9140.13,2802.17 9180.17,2842.2 9394.31,2842.2 ; 9132.5,4551.77 9140.76,4560.04 9191.55,4560.04 ; 9152.18,3401.38 9149.98,3399.17 ; 9191.55,4384.45 9191.55,4460.04 ; 9209.03,5266.1 9618.52,5266.1 9625.21,5259.41 ; 9209.03,5366.1 9316.91,5366.1 9399.82,5449.02 9536.04,5449.02 ; 9209.03,5564.65 9209.03,5566.1 ; 9220.88,3794.8 9193.17,3794.8 9149.98,3751.61 9149.98,3399.17 ; 9220.88,3814.49 9234.07,3801.3 9624.62,3801.3 ; 9220.88,3894.8 9176.79,3894.8 ; 9220.88,3994.8 9500.02,3994.8 9511.43,3983.39 9511.43,3883.39 ; 9319.5,4620.67 9319.5,4512.4 9339.19,4492.72 9575.41,4492.72 ; 9337.5,1724.43 9337.5,1758.19 ; 9363.8,4091.65 9360.65,4094.8 9220.88,4094.8 ; 9453.95,4091.65 9463.8,4091.65 9585.25,4091.65 ; 9470.29,4666.73 9526.2,4666.73 ; 9476.2,4866.73 9526.2,4866.73 ; 9495.79,4766.73 9526.2,4766.73 ; 9521.79,5555.71 9388.4,5555.71 9378.56,5565.55 9378.01,5566.1 9209.03,5566.1 ; 9526.2,4566.73 9473.44,4566.73 9319.5,4720.67 9280.13,4760.04 9191.55,4760.04 8986.43,4760.04 8963.05,4736.65 8963.05,4403.02 8935.65,4375.62 8708.25,4375.62 8679.74,4404.13 8679.74,5083.27 ; 9536.04,5349.02 9586.04,5349.02 ; 9624.62,4069.25 9624.62,4052.28 ; 9624.62,5723.03 9624.62,5719.53 ; 9624.62,6288.03 9624.62,6568.03 9624.62,6843.03 9624.62,7118.03 9624.62,7398.03 9624.62,7673.03 9624.62,7948.03 9624.62,8223.03 9624.62,8265.75 ; 9624.62,6330.24 9624.62,5719.53 ; 9625.21,3744.68 9625.21,3718.5 ; 9625.21,3801.3 9624.62,3801.3 ; 9625.21,4096.57 9620.29,4091.65 9585.25,4091.65 ; 9625.21,4126.1 9619.7,4126.1 9585.25,4091.65 ; 406.24,3639.76 406.24,3698.82 ; 406.24,3639.76 455.45,3688.98 ; 406.24,3698.82 406.24,3728.35 ; 406.24,3698.82 416.08,3688.98 455.45,3688.98 ; 406.24,3728.35 406.24,5077.95 ; 406.24,3728.35 416.08,3728.35 455.45,3688.98 ; 406.24,5077.95 455.45,5127.17 ; 406.24,5077.95 406.24,5116.14 ; 406.24,5116.14 406.24,5175.2 ; 406.24,5116.14 417.26,5127.17 455.45,5127.17 ; 406.24,5175.2 406.24,6072.05 ; 406.24,5175.2 407.42,5175.2 455.45,5127.17 ; 406.24,6072.05 451.35,6117.17 ; 406.24,6072.05 406.24,6101.57 ; 406.24,6101.57 421.83,6117.17 451.35,6117.17 ; 406.24,6101.57 406.24,6166.38 ; 406.24,6166.38 455.45,6117.17 ; 406.24,6166.38 406.24,7174.41 ; 406.24,7174.41 448.99,7217.17 ; 406.24,7174.41 406.24,7213.78 ; 406.24,7213.78 409.62,7217.17 448.99,7217.17 ; 406.24,7213.78 406.24,7262.99 ; 406.24,7262.99 409.62,7262.99 455.45,7217.17 ; 406.24,7262.99 406.24,7568.11 ; 406.24,7568.11 455.29,7617.17 ; 406.24,7568.11 406.24,7617.32 ; 406.24,7617.32 406.24,7666.38 ; 406.24,7617.32 406.39,7617.17 455.29,7617.17 ; 406.24,7666.38 406.24,7874.02 ; 406.24,7666.38 455.45,7617.17 ; 406.24,7874.02 438.01,7905.79 ; 406.24,7874.02 406.24,7937.56 ; 406.24,7937.56 438.01,7905.79 ; 406.24,7937.56 406.24,8501.97 ; 406.24,8501.97 444.98,8540.71 ; 406.24,8501.97 406.24,8541.34 ; 406.24,8541.34 406.87,8540.71 444.98,8540.71 ; 406.24,8541.34 406.24,8580.71 ; 406.24,8580.71 446.24,8540.71 ; 406.24,8580.71 406.24,8866.14 406.24,8935.04 435.76,8964.57 565.29,8964.57 ; 438.01,7905.79 902.66,7905.79 ; 444.98,8540.71 446.24,8540.71 ; 446.24,8540.71 455.45,8531.5 918.05,8531.5 ; 448.99,7217.17 455.45,7217.17 ; 451.35,6117.17 455.45,6117.17 ; 455.29,7617.17 455.45,7617.17 ; 455.45,5127.17 524.35,5127.17 ; 455.45,6117.17 892.66,6117.17 ; 455.45,7617.17 932.66,7617.17 ; 514.5,2379.92 553.87,2379.92 ; 514.5,2379.92 553.87,2340.55 ; 514.5,2379.92 553.87,2419.29 ; 524.35,2714.57 553.87,2685.04 ; 524.35,2714.57 553.87,2714.57 ; 524.35,2714.57 553.87,2744.09 ; 524.35,5127.17 553.87,5156.69 560.57,5156.69 ; 524.35,5127.17 560.57,5127.17 560.57,5156.69 ; 553.87,2340.55 553.87,2379.92 ; 553.87,2379.92 553.87,2419.29 ; 553.87,2419.29 553.87,2685.04 ; 553.87,2685.04 553.87,2714.57 ; 553.87,2714.57 553.87,2744.09 ; 565.29,8964.57 662.14,8964.57 ; 565.29,8964.57 614.5,8915.35 ; 612.93,4269.84 660.57,4222.2 ; 612.93,4269.84 660.41,4269.84 660.57,4269.69 ; 612.93,4269.84 660.57,4317.48 ; 612.93,4871.26 660.57,4823.62 ; 612.93,4871.26 659.19,4871.26 660.57,4869.88 ; 612.93,4871.26 660.57,4918.9 ; 614.5,8915.35 662.14,8962.99 662.14,8964.57 ; 622.77,4569.84 657.18,4535.43 660.57,4535.43 ; 622.77,4569.84 660.57,4607.64 ; 660.57,4222.2 660.57,4269.69 ; 660.57,4269.69 660.57,4317.48 ; 660.57,4317.48 660.57,4535.43 ; 660.57,4535.43 660.57,4607.64 ; 660.57,4607.64 660.57,4823.62 ; 660.57,4823.62 660.57,4869.88 ; 660.57,4869.88 660.57,4918.9 ; 662.14,8964.57 2207.42,8964.57 ; 822.78,8767.72 867.26,8812.2 ; 822.78,8767.72 867.26,8767.72 867.26,8812.2 ; 892.66,6117.17 932.66,6117.17 932.66,6077.17 ; 892.66,6117.17 932.66,6077.17 ; 902.66,7905.79 902.66,7647.17 932.66,7617.17 ; 918.05,2379.92 947.57,2350.39 ; 918.05,2379.92 947.57,2379.92 ; 918.05,2379.92 947.57,2409.45 ; 918.05,2714.57 947.57,2714.57 ; 918.05,2714.57 947.57,2685.04 ; 918.05,2714.57 947.57,2744.09 ; 918.05,8531.5 967.26,8580.71 ; 918.05,8531.5 1006.63,8531.5 ; 947.57,2350.39 947.57,2379.92 ; 947.57,2379.92 947.57,2409.45 ; 947.57,2409.45 947.57,2685.04 ; 947.57,2685.04 947.57,2714.57 ; 947.57,2714.57 947.57,2744.09 ; 967.26,8570.87 967.26,8580.71 ; 967.26,8570.87 1006.63,8531.5 ; 1006.63,8531.5 1105.06,8531.5 1144.27,8492.28 1144.27,8364.83 1144.43,8364.67 1144.43,8255.91 1223.17,8177.17 1557.81,8177.17 1597.18,8216.54 1597.18,8521.65 1469.23,8521.65 ; 1055.84,8330.78 1055.84,8324.1 1062.35,8317.6 1062.35,8131.29 1095.21,8098.43 1360.96,8098.43 ; 1331.43,2379.92 1370.8,2340.55 ; 1331.43,2379.92 1370.8,2379.92 ; 1331.43,2379.92 1370.8,2419.29 ; 1331.43,2714.57 1370.8,2675.2 ; 1331.43,2714.57 1370.8,2714.57 ; 1331.43,2714.57 1370.8,2753.94 ; 1331.43,8728.35 1370.8,8767.72 ; 1331.43,8728.35 1331.43,8767.72 ; 1331.43,8767.72 1331.43,8807.09 ; 1331.43,8767.72 1370.8,8767.72 ; 1331.43,8807.09 1370.8,8767.72 ; 1360.96,8098.43 1400.33,8059.06 ; 1360.96,8098.43 1439.7,8098.43 ; 1370.8,2340.55 1370.8,2379.92 ; 1370.8,2379.92 1370.8,2419.29 ; 1370.8,2419.29 1370.8,2675.2 ; 1370.8,2675.2 1370.8,2714.57 ; 1370.8,2714.57 1370.8,2753.94 ; 1370.8,8767.72 1397.97,8767.72 1528.28,8767.72 1587.34,8826.77 1853.09,8826.77 ; 1400.33,8059.06 1439.7,8098.43 ; 1410.17,5817.17 1480.09,5817.17 ; 1410.17,8521.65 1439.7,8551.18 ; 1410.17,8521.65 1469.23,8521.65 ; 1439.7,8551.18 1469.23,8521.65 ; 1479.07,5599.61 1528.28,5599.61 ; 1479.07,5599.61 1528.28,5648.82 ; 1480.09,5817.17 1528.28,5865.35 ; 1480.09,5817.17 1527.26,5817.17 1528.28,5816.14 ; 1480.09,5817.17 1528.28,5768.98 ; 1528.28,5599.61 1577.5,5599.61 ; 1528.28,5599.61 1528.28,5648.82 ; 1528.28,5648.82 1577.5,5599.61 ; 1528.28,5648.82 1528.28,5768.98 ; 1528.28,5768.98 1528.28,5816.14 ; 1528.28,5816.14 1528.28,5865.35 ; 1528.28,5865.35 1528.28,7202.76 1558.64,7233.11 1779.12,7233.11 1779.48,7233.46 1824.74,7233.46 1853.09,7261.81 1853.09,7399.61 ; 1632.66,7517.17 1642.66,7517.17 ; 1632.66,7517.17 1672.66,7557.17 1682.66,7557.17 ; 1642.66,7517.17 1672.66,7517.17 1682.66,7507.17 ; 1642.66,7517.17 1682.66,7477.17 ; 1674.35,3441.34 1674.35,3405.12 1675.92,3403.54 ; 1674.35,3441.34 1674.35,3442.91 ; 1674.35,3442.91 1713.72,3403.54 ; 1675.92,3403.54 1713.72,3403.54 ; 1682.66,7477.17 1682.66,7486.27 ; 1682.66,7486.27 1715.29,7518.9 ; 1682.66,7486.27 1682.66,7507.17 ; 1682.66,7507.17 1682.66,7518.9 ; 1682.66,7518.9 1715.29,7518.9 ; 1682.66,7518.9 1682.66,7557.17 ; 1682.66,7557.17 1720.93,7518.9 ; 1715.29,7518.9 1720.93,7518.9 ; 1720.41,3103.15 1764.5,3059.06 ; 1720.41,3103.15 1720.41,3133.07 ; 1720.41,3103.15 1720.41,3064.17 1715.29,3059.06 1764.5,3059.06 ; 1720.41,3133.07 1754.66,3167.32 1720.41,3167.32 ; 1720.41,3133.07 1720.41,3167.32 ; 1720.93,7518.9 1813.72,7518.9 ; 1749.74,2379.92 1749.74,2375 1784.19,2340.55 ; 1749.74,2379.92 1784.19,2379.92 ; 1749.74,2379.92 1784.19,2414.37 ; 1754.66,2714.57 1784.19,2685.04 ; 1754.66,2714.57 1784.19,2744.09 ; 1764.5,3059.06 1784.19,3039.37 1784.19,2744.09 ; 1784.19,2340.55 1784.19,2379.92 ; 1784.19,2379.92 1784.19,2414.37 ; 1784.19,2414.37 1784.19,2685.04 ; 1784.19,2685.04 1784.19,2744.09 ; 1784.74,4959.84 1786.55,4959.84 1784.74,4961.65 ; 1784.74,4959.84 1784.74,4961.65 ; 1813.72,7518.9 1853.09,7558.27 ; 1813.72,7518.9 1853.09,7479.53 ; 1853.09,7399.61 1853.09,7479.53 ; 1853.09,7399.61 1853.09,7479.53 ; 1853.09,7479.53 1853.09,7558.27 ; 1853.09,7558.27 1853.09,7793.31 ; 1853.09,7793.31 1853.09,7822.83 ; 1853.09,7793.31 1890.09,7830.31 ; 1853.09,7822.83 1853.09,7872.05 ; 1853.09,7822.83 1860.57,7830.31 1890.09,7830.31 ; 1853.09,7872.05 1853.09,8826.77 ; 1853.09,7872.05 1860.57,7872.05 1902.3,7830.31 ; 1853.09,8826.77 2047.57,8826.77 2158.2,8826.77 2177.89,8807.09 2177.89,8462.6 2205.84,8434.65 2412.54,8434.65 2500.53,8346.65 2500.53,7901.57 ; 1890.09,7830.31 1902.3,7830.31 ; 2022.77,3206.69 2062.14,3246.06 ; 2022.77,3206.69 2022.77,3246.06 ; 2022.77,3246.06 2022.77,3292.91 ; 2022.77,3246.06 2062.14,3246.06 ; 2022.77,3292.91 2069.62,3246.06 ; 2062.14,3246.06 2069.62,3246.06 ; 2207.42,8964.57 2236.94,8964.57 2236.94,8928.86 ; 2207.42,8964.57 2207.42,8958.39 2236.94,8928.86 ; 2236.94,8928.86 2276.32,8968.23 ; 2276.32,8968.23 9553.6,8968.23 9559.78,8974.41 9624.62,8909.57 9624.62,8354.33 ; 2500.53,7901.57 2500.53,7756.1 2547.46,7709.17 3034.19,7709.17 ; 3034.19,7709.17 3075.28,7709.17 3075.28,7750.27 ; 3034.19,7709.17 3075.28,7750.27 ; 3163.72,6770.87 3221.59,6770.87 3221.59,6828.74 ; 3163.72,6770.87 3221.59,6828.74 ; 4380.28,8094.17 4470.28,8094.17 ; 4380.28,8094.17 4425.28,8139.17 ; 4425.28,8139.17 4470.28,8094.17 ; 4470.28,8094.17 5195.28,8094.17 ; 4800.28,8909.17 4840.28,8909.17 ; 4800.28,8909.17 4800.28,8904.17 4835.28,8869.17 ; 4835.28,8869.17 4865.28,8899.17 4865.28,8909.17 ; 4835.28,8869.17 4835.28,8904.17 4840.28,8909.17 ; 4840.28,8909.17 4865.28,8909.17 ; 5195.28,8094.17 5235.28,8094.17 ; 5195.28,8094.17 5195.28,8099.17 5235.28,8139.17 ; 5235.28,8094.17 5275.28,8094.17 ; 5235.28,8094.17 5235.28,8139.17 ; 5235.28,8139.17 5275.28,8099.17 5275.28,8094.17 ; 5396.39,1224.84 5435.76,1224.84 ; 5396.39,1224.84 5396.39,1224.94 5435.72,1264.26 ; 5435.72,1264.26 5435.72,1224.89 5435.76,1224.84 ; 5435.72,1264.26 5475.13,1224.84 ; 5435.76,1224.84 5475.13,1224.84 ; 5475.13,1224.84 5776.2,1224.84 ; 5553.87,1641.73 5566.3,1629.31 6004.05,1629.31 6039.23,1664.49 6039.23,1678.23 6119.23,1678.23 6139.23,1658.23 6139.23,1533.46 ; 5776.2,1224.84 5815.57,1224.84 ; 5776.2,1224.84 5815.57,1264.21 ; 5815.57,1224.84 5854.94,1224.84 ; 5815.57,1224.84 5815.57,1264.21 ; 5815.57,1264.21 5815.57,1441.54 5857.26,1483.23 5988.99,1483.23 ; 5815.57,1264.21 5854.94,1224.84 ; 5854.94,1224.84 9565.41,1224.84 9624.62,1284.06 9624.62,1303.74 9625.21,1304.33 9625.21,1973.03 ; 5904.15,1746.65 5904.15,1786.02 5943.52,1786.02 ; 5904.15,1746.65 5943.52,1786.02 ; 5913.99,2100.98 5943.52,2130.51 ; 5913.99,2100.98 5913.99,2130.51 ; 5913.99,2130.51 5943.52,2130.51 ; 5988.99,1483.23 6039.23,1483.23 6039.23,1533.46 ; 5988.99,1483.23 6039.23,1533.46 ; 6136.91,3468.07 6146.75,3468.07 ; 6136.91,3468.07 6176.28,3507.44 ; 6139.23,1533.46 6139.23,1483.23 6189.46,1483.23 ; 6139.23,1533.46 6189.46,1483.23 ; 6146.75,3468.07 6171.35,3468.07 6171.35,3443.46 ; 6146.75,3468.07 6171.35,3443.46 ; 6156.59,2749.57 6176.28,2769.25 6176.28,3409.02 6176.28,3438.54 ; 6171.35,3443.46 6176.28,3438.54 ; 6176.28,3438.54 6176.28,3507.44 ; 6189.46,1483.23 6622.65,1483.23 ; 6622.65,1483.23 6649.31,1483.23 6661.47,1471.06 ; 6622.65,1483.23 6661.47,1444.41 ; 6661.47,1444.41 6661.47,1471.06 ; 6661.47,1444.41 6661.47,1314.13 6691.71,1283.9 7272.26,1283.9 ; 7032.97,1799.21 7032.97,1887.8 ; 7032.97,1799.21 7036.75,1799.21 7079.15,1841.61 ; 7032.97,1887.8 7079.15,1841.61 ; 7272.26,1283.9 7351.16,1283.9 ; 7272.26,1283.9 7272.26,1292.87 7322.5,1343.11 ; 7322.5,1341.93 7322.5,1343.11 ; 7322.5,1341.93 7322.5,1312.56 7351.16,1283.9 ; 7322.5,1341.93 7380.53,1283.9 ; 7351.16,1283.9 7380.53,1283.9 ; 7380.53,1283.9 8384.31,1283.9 8423.83,1323.42 8423.83,1923.82 ; 7518.32,1776.18 7518.32,1707.28 7587.22,1707.28 ; 7518.32,1776.18 7587.22,1707.28 ; 7640.02,2012.4 7673.13,2045.51 ; 7640.02,2012.4 7673.13,2012.4 ; 7640.02,2012.4 7673.13,1979.29 ; 7665.96,3215.63 7704.07,3177.52 ; 7665.96,3215.63 7627.85,3177.52 7704.07,3177.52 ; 7673.13,1973.03 7673.13,1979.29 ; 7673.13,1973.03 7712.5,2012.4 ; 7673.13,1979.29 7673.13,2012.4 ; 7673.13,2012.4 7673.13,2045.51 ; 7673.13,2012.4 7712.5,2012.4 ; 7673.13,2045.51 7673.13,2051.77 ; 7673.13,2051.77 7712.5,2012.4 ; 7712.5,2012.4 7882.5,2012.4 ; 7882.5,2012.4 7921.87,2012.4 ; 7882.5,2012.4 7882.5,2022.24 7921.87,2061.61 ; 7921.87,2012.4 7971.08,2012.4 ; 7921.87,2012.4 7921.87,2061.61 ; 7921.87,2061.61 7971.08,2012.4 ; 7971.08,2012.4 8935.65,2012.4 ; 8270.41,3517.28 8319.62,3517.28 ; 8270.41,3517.28 8315.57,3562.44 ; 8315.57,3562.44 8315.57,4204.84 ; 8315.57,3562.44 8358.99,3519.02 8358.99,3517.28 ; 8315.57,3562.44 8315.57,3521.34 8319.62,3517.28 ; 8315.57,4204.84 8315.57,5083.27 8354.94,5122.64 8640.37,5122.64 ; 8315.57,4204.84 8339.15,4181.26 9198.68,4181.26 9220.88,4159.06 9220.88,4094.8 ; 8319.62,3517.28 8358.99,3517.28 ; 8358.99,3517.28 9006.24,3517.28 ; 8423.83,1923.82 9319.5,1923.82 9339.19,1904.13 9339.19,1824.25 9337.5,1822.55 ; 8473.05,4659.02 8511.39,4620.67 ; 8473.05,4659.02 8511.39,4659.02 8512.42,4660.04 8512.42,4620.67 8511.39,4620.67 ; 8640.37,5122.64 8719.11,5122.64 ; 8640.37,5122.64 8679.74,5083.27 ; 8679.74,5083.27 8719.11,5122.64 ; 8719.11,5122.64 9102.97,5122.64 9129.66,5149.33 9129.66,5543.03 9152.73,5566.1 9209.03,5566.1 ; 8935.65,2012.4 9576,2012.4 ; 9006.24,3517.28 9049.98,3473.54 ; 9006.24,3517.28 9044.5,3517.28 9049.98,3511.81 ; 9006.24,3517.28 9049.98,3561.02 ; 9049.98,3399.17 9049.98,3473.54 ; 9049.98,3473.54 9049.98,3511.81 ; 9049.98,3511.81 9049.98,3561.02 ; 9049.98,3561.02 9049.98,3860.35 9084.43,3894.8 9117.73,3894.8 ; 9117.73,3894.8 9176.79,3894.8 ; 9117.73,3894.8 9147.26,3924.33 ; 9147.26,3924.33 9147.26,4062.13 9179.94,4094.8 9220.88,4094.8 ; 9147.26,3924.33 9176.79,3894.8 ; 9305.31,1790.37 9337.5,1758.19 ; 9305.31,1790.37 9337.5,1822.55 ; 9337.5,1758.19 9337.5,1822.55 ; 9575.41,4492.72 9585.84,4492.72 ; 9575.41,4492.72 9625.21,4542.52 ; 9575.84,8305.55 9584.82,8305.55 ; 9575.84,8305.55 9624.62,8354.33 ; 9576,2012.4 9585.84,2012.4 ; 9576,2012.4 9625.21,2061.61 ; 9578.91,5670.31 9618.28,5670.31 9624.62,5663.98 ; 9578.91,5670.31 9575.41,5670.31 9624.62,5719.53 ; 9578.91,5670.31 9624.62,5624.61 ; 9584.82,8305.55 9615.21,8305.55 9624.62,8314.96 ; 9584.82,8305.55 9624.62,8265.75 ; 9585.25,4091.65 9624.62,4052.28 ; 9585.84,2012.4 9625.21,2012.4 ; 9585.84,2012.4 9625.21,1973.03 ; 9585.84,4492.72 9625.21,4492.72 ; 9585.84,4492.72 9625.21,4453.35 ; 9586.04,5349.02 9589.74,5349.02 ; 9586.04,5349.02 9624.62,5387.6 ; 9589.74,5349.02 9606.55,5349.02 9624.62,5367.09 ; 9589.74,5349.02 9625.21,5313.54 ; 9624.62,3801.3 9624.62,4017.83 ; 9624.62,3801.3 9624.62,3719.09 9625.21,3718.5 ; 9624.62,4017.83 9624.62,4052.28 ; 9624.62,4017.83 9625.21,4018.43 9625.21,4453.35 ; 9624.62,5367.09 9624.62,5387.6 ; 9624.62,5367.09 9625.21,5367.68 9625.21,5313.54 ; 9624.62,5387.6 9624.62,5624.61 ; 9624.62,5624.61 9624.62,5663.98 ; 9624.62,5663.98 9624.62,5719.53 ; 9624.62,8265.75 9624.62,8314.96 ; 9624.62,8314.96 9624.62,8354.33 ; 9625.21,1973.03 9625.21,2012.4 ; 9625.21,2012.4 9625.21,2061.61 ; 9625.21,2061.61 9625.21,3718.5 ; 9625.21,4453.35 9625.21,4492.72 ; 9625.21,4492.72 9625.21,4542.52 ; 9625.21,4542.52 9625.21,4659.02 9625.21,5073.43 ; 9625.21,5073.43 9625.21,5259.41 ; 9625.21,5259.41 9625.21,5313.54
  Bottom Layer w78.74: 7370.76,2188.54 7370.76,2297.91

## Silkscreen, mask and mechanical layers (free items; w line width, h text height)
Top Overlay:
  lines w10: 372.66,3698.82 2660.17,3698.82 ; 372.66,6442.17 372.66,7777.17 ; 372.66,6657.17 372.66,5652.17 372.66,5637.17 ; 1917.66,5637.17 2660.17,5637.17 2660.17,3896.85 ; 1921.98,8423.23 2561.75,8423.23 ; 2660.17,3905.51 2660.17,1267.72 2663.52,1264.37 ; 5278.28,1973.03 5281.63,1969.68 5281.63,1264.37 5721.2,1264.37 ; 5297.97,1264.37 2663.52,1264.37 ; 5721.2,1973.03 5721.2,1264.37 ; 6370.8,6937.01 2561.75,6937.01 2560.29,6938.46 2560.29,7772.17 ; 7400.21,1973.03 6258.48,1973.03 ; 7928.24,1973.03 9734.15,1973.03 9734.15,1263.11 9732.89,1264.37 8404.15,1264.37 ; 8271,3668.31 8271,5703.35 ; 8271,4265.31 9730.68,4265.31 ; 8271,5170.83 9730.68,5170.83 ; 8404.15,1973.03 8404.15,1953.35 8404.15,1264.37 ; 9734.15,1953.35 9734.15,3407.37 ; 9734.15,3315.39 9734.15,4073.27 ; 9734.15,4063.43 9734.15,4860.67 9734.15,5706.69 ; 9760.21,3668.31 7941.55,3668.31 ; 372.66,5637.17 372.66,1276.66 360.37,1264.37 2663.52,1264.37 ; 372.66,5637.17 1912.66,5637.17 1921.98,5637.17 1921.98,7772.17 ; 1921.98,7772.17 2560.29,7772.17 ; 1921.98,7772.17 372.66,7772.17 372.66,8885.83 1921.98,8885.83 ; 1921.98,7772.17 1921.98,8885.83 ; 1921.98,8885.83 1922.66,8885.15 2561.07,8885.15 2561.75,8885.83 2561.75,8423.23 ; 2560.29,7772.17 2561.75,7773.62 2561.75,7793.31 ; 2561.75,7793.31 2561.75,7793.31 ; 2561.75,7793.31 2561.75,8423.23 ; 5721.2,1264.37 6258.48,1264.37 ; 6258.48,1264.37 7390.37,1264.37 ; 6258.48,1264.37 6258.48,1973.03 ; 6258.48,1973.03 4166.08,1973.03 4164.39,1974.72 4164.39,3668.31 6258.48,3668.31 ; 6258.48,1973.03 6258.48,3668.31 ; 6258.48,3668.31 7941.55,3668.31 ; 7390.37,1264.37 8404.15,1264.37 ; 7390.37,1264.37 7390.37,1973.03 7941.55,1973.03 7941.55,3668.31 ; 6357.89,5703.35 9732.89,5703.35 9732.89,8953.03 6357.89,8953.03 6357.89,5703.35
Mechanical 13:
  lines w10: 549.86,4871.1 556.86,4878.1 ; 317.65,1129.92 317.65,9003.94 9761.94,9003.94 9761.94,1129.92 317.65,1129.92

## Text inside footprints (layer, text, board x,y; h text height)
J2: Top Overlay "1" at 9349.16,2611.87 h50.07 r90; Top Overlay "2" at 9349.25,2717.13 h50.03 r90; Top Overlay "3" at 9349.3,2827.2 h50 r90; Top Overlay "4" at 9349.29,2932.22 h50.01 r90; Top Overlay "5" at 9349.29,3042.24 h50.01 r90; Top Overlay "6" at 9599.59,2656.86 h50.09 r90; Top Overlay "7" at 9599.52,2772.11 h50.07 r90; Top Overlay "8" at 9599.32,2877.21 h50.01 r90; Top Overlay "9" at 9599.61,2992.5 h50.1 r90
P23: Top Overlay "6" at 6251.43,13008.27 h50 r90; Top Overlay "10" at 6251.43,13568.27 h50 r90; Top Overlay "5" at 6351.43,13568.27 h50 r90; Top Overlay "1" at 6351.43,13008.27 h50 r90